# Altium PCB ChargerV2.PcbDoc
Units mm, origin at the board's own origin, x right, y up, seen from the top; angles counter-clockwise.
Board outline 48 x 33 mm, 2 copper layers (Top Layer, Bottom Layer); 15 components, 11 nets, 54 pads, 4 vias.
Unrouted connection lines stored in the file: 1.
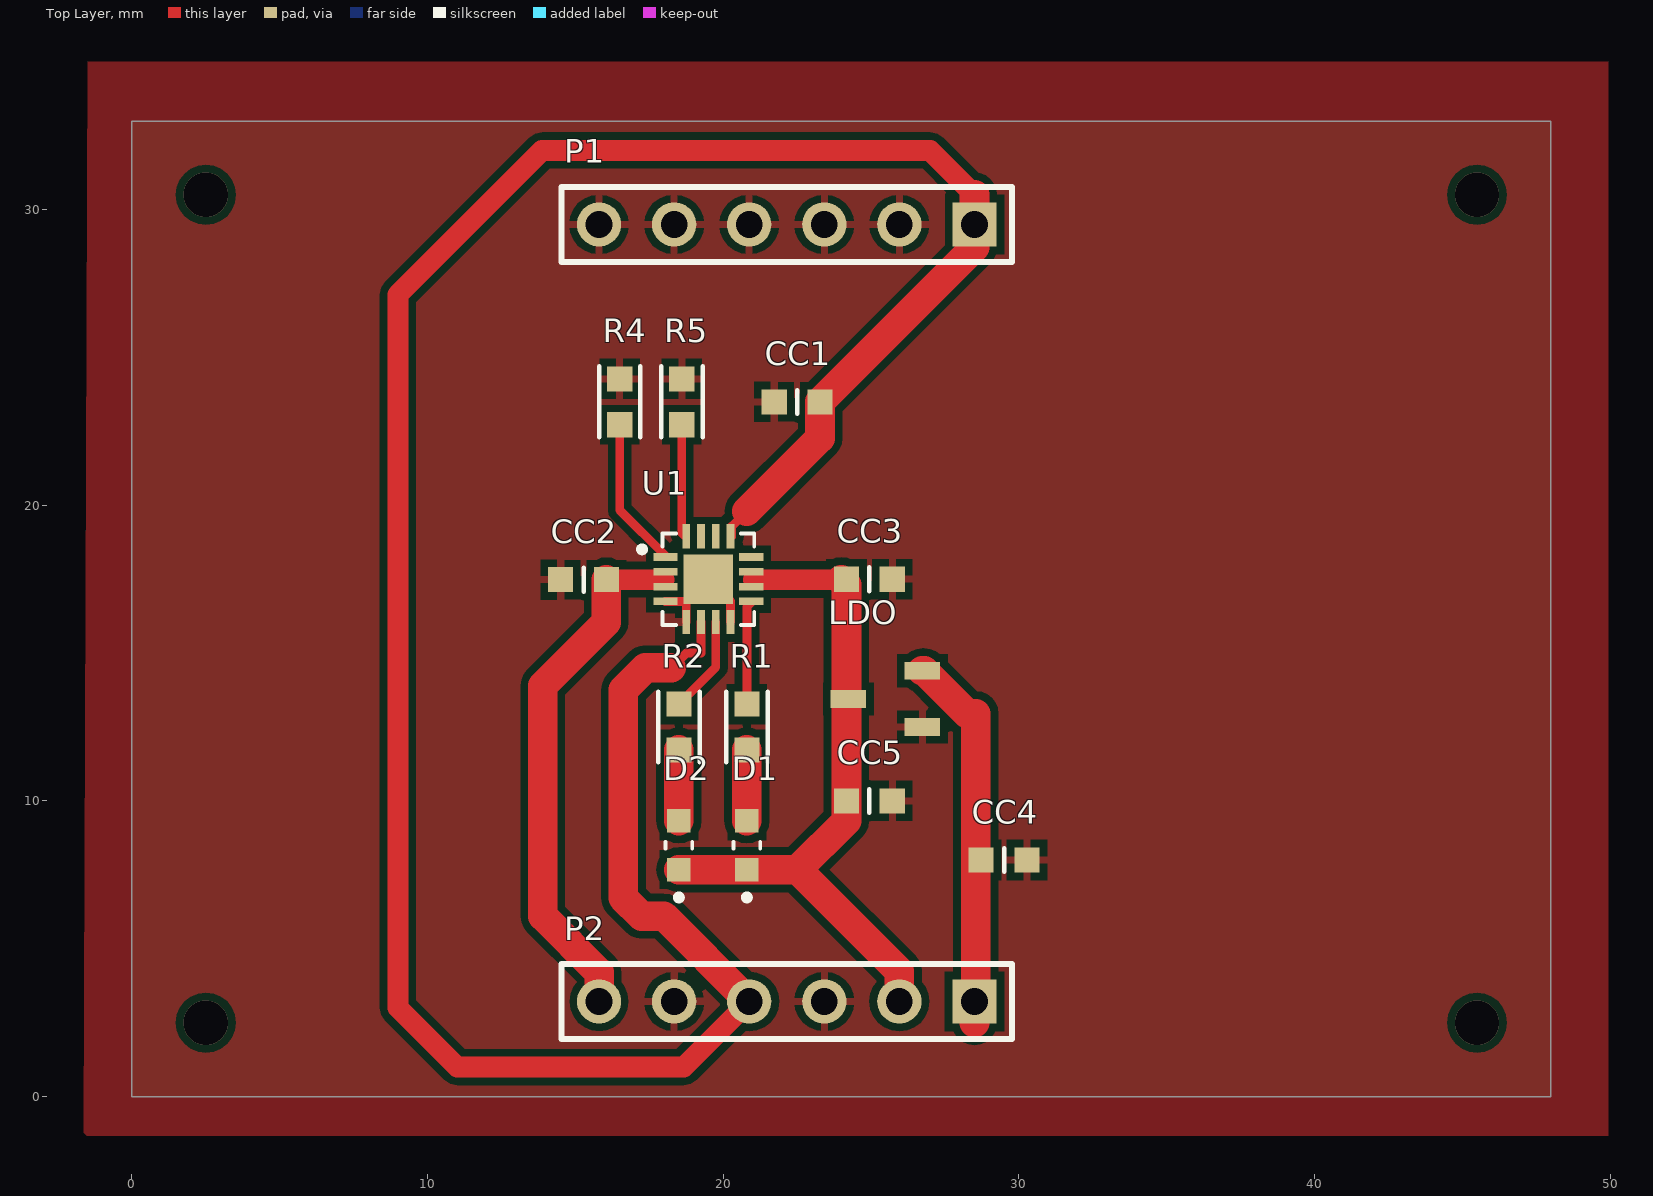
[diagram p0: Top Layer view]
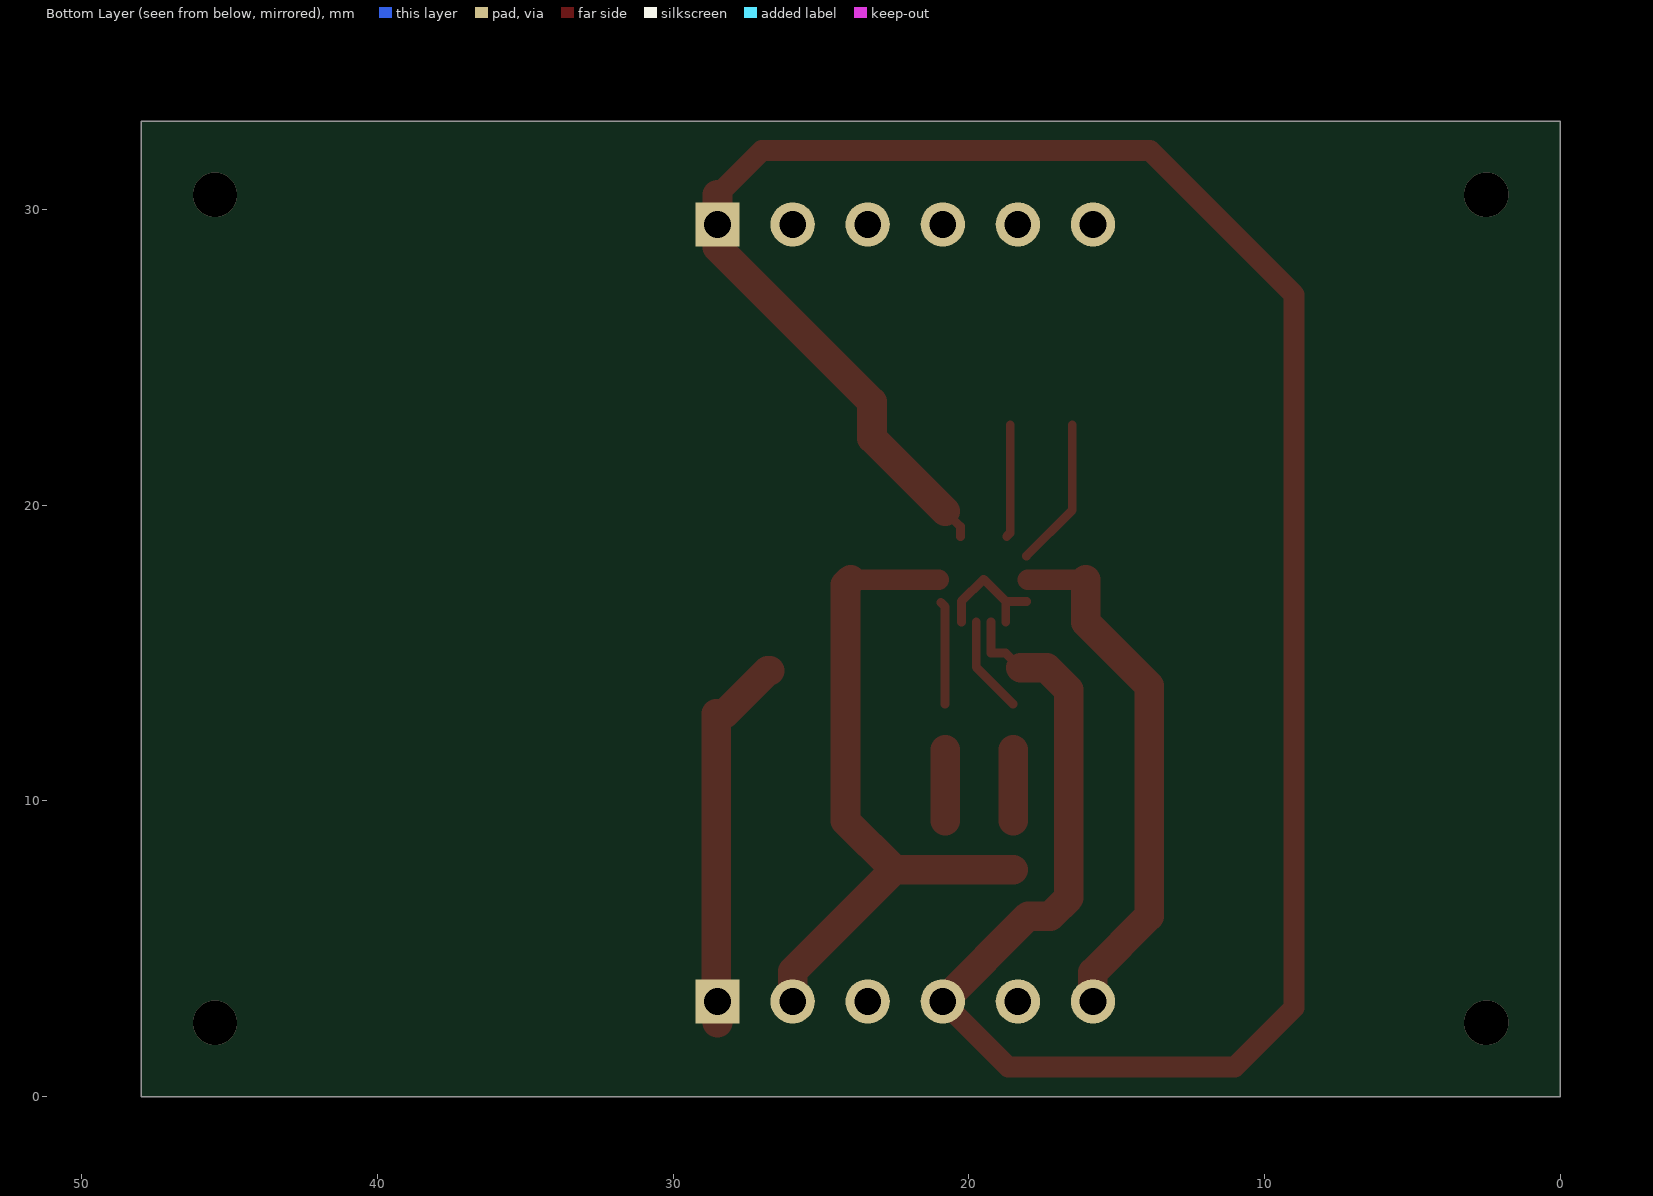
[diagram p1: Bottom Layer view, seen from below]
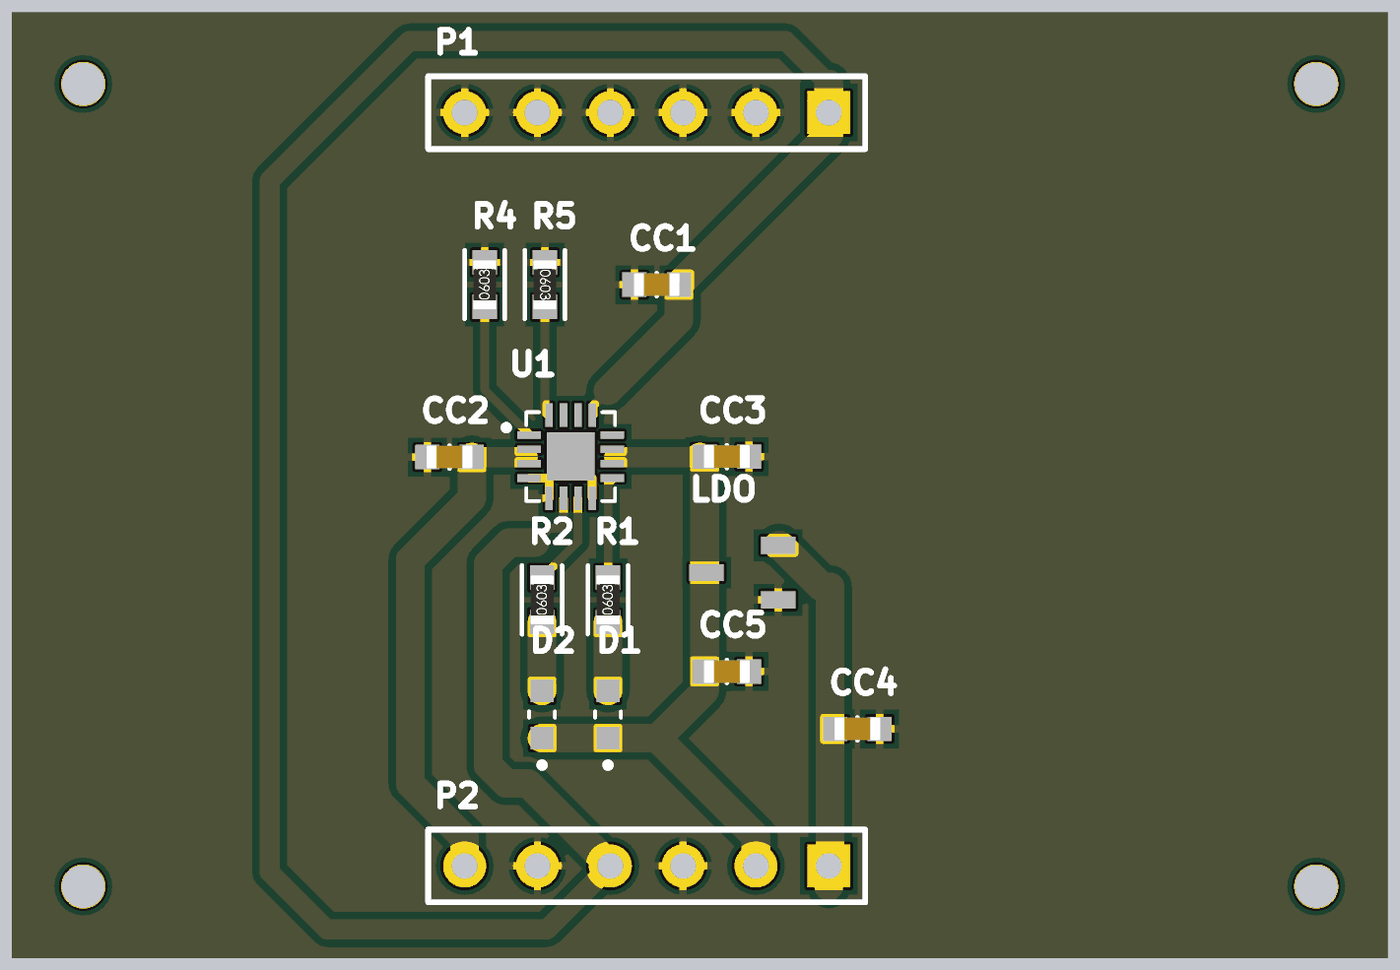
[diagram p2: 3D render of the assembled board from above, using the file's embedded part models]

## Layer stack, top to bottom
Top Solder: solder mask 0.0102, Solder Resist, Dk 3.5
Top Layer: signal copper 0.0356
Dielectric 1: dielectric 0.32, FR-4, Dk 4.8
Bottom Layer: signal copper 0.0356
Bottom Solder: solder mask 0.0102, Solder Resist, Dk 3.5

## Board outline
0,0 48,0 48,33 0,33

## Design rules (kind name [scope] priority, off if disabled: settings)
Clearance [All] p1: gap=0.254 ignorepadtopadclearanceinfootprint=FALSE except(0: Arc-Hole Track-Hole SMDPad-Hole THPad-Hole Via-Hole Fill-Hole Poly-Hole Region-Hole Text-Hole)
PolygonConnect [All] p1: connectstyle=Relief reliefconductorwidth=0.254 reliefentries=4 polygonreliefangle="90 Angle" airgapwidth=0.254
RoutingVias [All] p1: holewidth=0.711 width=1.27 viastyle="Through Hole" minholewidth=0.711 minwidth=1.27 maxholewidth=0.711 maxwidth=1.27
SolderMaskExpansion [All] p1: expansion=0.102
Width [All] p1: maxlimit=1 minlimit=0.254 preferedwidth=0.7 toplayer_minwidth=0.3 bottomlayer_maxwidth=0.254 bottomlayer_prefwidth=0.254 minimp=50.000000 maximp=50.000000 favimp=50.000000
30 further rules are at their usual default settings.

## Components (designator, comment, footprint, x,y, rotation, side; value= is the part's Value field where it differs from the comment)
CC1 "1µF" SMD-0603C 22.5,23.5 r90 top
CC2 "1µF" SMD-0603C 15.275,17.484 r90 top
CC3 "4.7µF" SMD-0603C 24.945,17.5 r90 top
CC4 "1µF" SMD-0603C 29.5,8 r90 top
CC5 "1µF" SMD-0603C 24.945,10 r270 top
D1 "SML-D12U1WT86" *LED_SML-D12Y1WT86_SML-D12U1WT86(Primary) 20.8,8.5 r90 top
D2 "SML-D12U1WT86" *LED_SML-D12Y1WT86_SML-D12U1WT86(Primary) 18.5,8.5 r90 top
LDO "250mA 3.3V Ultra Low IQ LDO Reg. SOT23 DiodesZetex AP2138N-3.3TRG1, Low Noise LDO Voltage Regulator, 250 (Min)mA, 3.3 V +/-2%, 2.5 to 6.6 Vin, 3-Pin SOT-23Source:  Datasheet" SOT95P282X145-3N 25.486,13.45 r180 top
P1 "Header 6" HDR1X6 28.5,29.5 r180 top
P2 "Header 6" HDR1X6 28.5,3.216 r180 top
R1 "1.5k" SMD-0603-RES 20.8,12.5 r0 top
R2 "1.5k" SMD-0603-RES 18.5,12.5 r0 top
R4 "10k" SMD-0603-RES 16.5,23.5 r0 top
R5 "3.4k" SMD-0603-RES 18.6,23.5 r180 top
U1 "BQ24232HARGTR" *QFN50P300X300X100-17N 19.5,17.5 r0 top

## Footprints (in the part's own frame and the unit in brackets; to place one, negate y for a bottom-side part, rotate by r counter-clockwise, add the part's x,y. Pads: shape width x height; smd on the part's side, far side on the other; paste and mask are expansions set on the pad)
*LED_SML-D12Y1WT86_SML-D12U1WT86(Primary) [mm]
  rect 0.8x0.8 smd: A(0.825,0) C(-0.825,0)
  silkscreen extent -1.86,-0.45 0.11,0.45
*QFN50P300X300X100-17N [mm]
  rect 0.82x0.26 smd: 1(-1.45,0.75) 2(-1.45,0.25) 3(-1.45,-0.25) 4(-1.45,-0.75) 9(1.45,-0.75) 10(1.45,-0.25) 11(1.45,0.25) 12(1.45,0.75)
  rect 0.26x0.82 smd: 5(-0.75,-1.45) 6(-0.25,-1.45) 7(0.25,-1.45) 8(0.75,-1.45) 13(0.75,1.45) 14(0.25,1.45) 15(-0.25,1.45) 16(-0.75,1.45)
  rect 1.68x1.68 smd: 17(0,0)
  silkscreen extent -2.34,-1.55 1.55,1.55
HDR1X6 [mm] "Connector; Header; 6 Position"
  rect 1.5x1.5 hole 0.9: 1(0,0)
  round 1.5 hole 0.9: 2(2.54,0) 3(5.08,0) 4(7.62,0) 5(10.16,0) 6(12.7,0)
  silkscreen extent -1.27,-1.27 13.97,1.27
SMD-0603-RES [mm]
  rect 0.85x0.85 smd: 1(0,0.775) 2(0,-0.775)
  silkscreen extent -0.7,-1.2 0.7,1.2, body extent -0.4,-0.85 0.4,0.85, height 0.56
SMD-0603C [mm]
  rect 0.85x0.85 smd: 1(0,0.775) 2(0,-0.775)
  silkscreen extent -0.4,0 0.4,0, body extent -0.4,-0.8 0.4,0.8, height 0.9
SOT95P282X145-3N [mm]
  rect 1.2x0.6 smd: 1(-1.25,0.95) 2(-1.25,-0.95) 3(1.25,0)

## Part data
CC1 CC2 CC4 CC5: library part GRM188R61A105KA61D, "CAP CER 1UF 10V X5R 0603", Digi-Key Part Number=490-1543-1-ND, Manufacturer="Murata Electronics North America", Operating Temperature="-55°C ~ 85°C", Package / Case="0603 (1608 Metric)", Ratings=-, Temperature Coefficient=X5R, Tolerance=±10%, Voltage=10V, @ qty=0, Applications="General Purpose", Datasheets=http://www.murata.com/~/media/webrenewal/support/library/catalog/products/capacitor/mlcc/c02e.pdf, Factory Stock=0, Features=-, Height - Seated (Max)=-, Image=//media.digikey.com/Renders/Murata%20Renders/ZRB-SERIES-0402.jpg, Lead Spacing=-, Lead Style=-, Minimum Quantity=1, Mounting Type="Surface Mount, MLCC", Packaging="Cut Tape (CT)", Part Number=GRM188R61A105KA61D, Part Status=Active, Quantity Available=2638296, Series=GRM, Size / Dimension="0.063\" L x 0.031\" W (1.60mm x 0.80mm)", Thickness (Max)="0.035\" (0.90mm)", Unit Price (USD)=0.1
CC3: library part GRM185R60G475ME15D, "CAP CER 4.7UF 4V X5R 0603", Digi-Key Part Number=490-3891-1-ND, Manufacturer="Murata Electronics North America", Operating Temperature="-55°C ~ 85°C", Package / Case="0603 (1608 Metric)", Ratings=-, Temperature Coefficient=X5R, Tolerance=±20%, Voltage=4V, @ qty=0, Applications="General Purpose", Datasheets=http://www.murata.com/~/media/webrenewal/support/library/catalog/products/capacitor/mlcc/c02e.pdf, Factory Stock=0, Features=-, Height - Seated (Max)=-, Image=//media.digikey.com/Renders/Murata%20Renders/ZRB-SERIES-0402.jpg, Lead Spacing=-, Lead Style=-, Minimum Quantity=1, Mounting Type="Surface Mount, MLCC", Packaging="Cut Tape (CT)", Part Number=GRM185R60G475ME15D, Part Status=Active, Quantity Available=29936, Series=GRM, Size / Dimension="0.063\" L x 0.031\" W (1.60mm x 0.80mm)", Thickness (Max)="0.020\" (0.50mm)", Unit Price (USD)=0.25
D1 D2: "SML-D12 Series Red 0603 Diffused 63 mcd 2.2 V Surface Mount LED", Package="0603 Rohm", Digi-Key_Part_Number=SML-D12U1WT86CT-ND, Digi-Key_Purchase_URL=https://www.digikey.com/product-detail/en/rohm-semiconductor/SML-D12U1WT86/SML-D12U1WT86CT-ND/5843858?utm_source=snapeda&utm_medium=aggregator&utm_campaign=symbol, MF=Rohm, MP=SML-D12U1WT86, SnapEDA_Link=https://www.snapeda.com/parts/SML-D12U1WT86/Rohm/view-part/?ref=snap
LDO: library part AP2138N-3.3TRG1, Manufacturer_Name="Diodes Inc.", Package=SOT95P282X145-3N, Allied_Number=70551004, Allied_Price-Stock=https://www.alliedelec.com/diodesinc-ap2138n-3-3trg1/70551004/, DeviceSetName=AP2138N-3.3TRG1, GateName_1=G$1, Height=1.45mm, LibraryName=AP2138N-3.3TRG1, Manufacturer_Part_Number=AP2138N-3.3TRG1, Mouser_Part_Number=621-AP2138N-3.3TRG1, Mouser_Price-Stock=https://www.mouser.com/Search/Refine.aspx?Keyword=621-AP2138N-3.3TRG1, RS_Part_Number=9210398P, RS_Price-Stock=http://uk.rs-online.com/web/p/products/9210398P, SymbolName_1=AP2138N-3.3TRG1
P1 P2: "Header, 6-Pin", LatestRevisionDate=17-Jul-2002, LatestRevisionNote="Re-released for DXP Platform.", Publisher="Altium Limited"
R1 R2: library part ERJ-3EKF1501V, "RES SMD 1.5K OHM 1% 1/10W 0603", Digi-Key Part Number=P1.50KHCT-ND, Manufacturer="Panasonic Electronic Components", Operating Temperature="-55°C ~ 155°C", Package / Case="0603 (1608 Metric)", Power (Watts)="0.1W, 1/10W", Supplier Device Package=0603, Temperature Coefficient=±100ppm/°C, Tolerance=±1%, @ qty=1500, Composition="Thick Film", Datasheets=http://industrial.panasonic.com/www-cgi/jvcr13pz.cgi?E+PZ+3+AOA0002+ERJ3EKF1501V+7+WW, Factory Stock=0, Failure Rate=-, Features="Automotive AEC-Q200", Height - Seated (Max)="0.022\" (0.55mm)", Image=//media.digikey.com/Photos/Panasonic%20Photos/MFG_ERJ-P6W%20Series.jpg, Minimum Quantity=1, Number of Terminations=2, Packaging="Cut Tape (CT)", Part Number=ERJ-3EKF1501V, Part Status=Active, Quantity Available=417970, Series=ERJ, Size / Dimension="0.063\" L x 0.031\" W (1.60mm x 0.80mm)", Unit Price (USD)=0.00379
R4: library part ERJ-PA3J103V, "RES SMD 10K OHM 5% 1/4W 0603", Digi-Key Part Number=P10KBZCT-ND, Manufacturer="Panasonic Electronic Components", Operating Temperature="-55°C ~ 155°C", Package / Case="0603 (1608 Metric)", Power (Watts)="0.25W, 1/4W", Supplier Device Package=0603, Temperature Coefficient=±200ppm/°C, Tolerance=±5%, @ qty=1500, Composition="Thick Film", Datasheets=https://industrial.panasonic.com/cdbs/www-data/pdf/RDA0000/AOA0000C243.pdf, Factory Stock=0, Failure Rate=-, Features="Automotive AEC-Q200, Pulse Withstanding", Height - Seated (Max)="0.022\" (0.55mm)", Image=//media.digikey.com/Photos/Panasonic%20Photos/MFG_ERJ-P6W%20Series.jpg, Minimum Quantity=1, Number of Terminations=2, Packaging="Cut Tape (CT)", Part Number=ERJ-PA3J103V, Part Status=Active, Quantity Available=26345, Series=ERJ, Size / Dimension="0.063\" L x 0.031\" W (1.60mm x 0.80mm)", Unit Price (USD)=0.01646
R5: library part ERJ-3EKF3401V, "RES SMD 3.4K OHM 1% 1/10W 0603", Digi-Key Part Number=P3.40KHCT-ND, Manufacturer="Panasonic Electronic Components", Operating Temperature="-55°C ~ 155°C", Package / Case="0603 (1608 Metric)", Power (Watts)="0.1W, 1/10W", Supplier Device Package=0603, Temperature Coefficient=±100ppm/°C, Tolerance=±1%, @ qty=1500, Composition="Thick Film", Datasheets=http://industrial.panasonic.com/www-cgi/jvcr13pz.cgi?E+PZ+3+AOA0002+ERJ3EKF3401V+7+WW, Factory Stock=0, Failure Rate=-, Features="Automotive AEC-Q200", Height - Seated (Max)="0.022\" (0.55mm)", Image=//media.digikey.com/Photos/Panasonic%20Photos/MFG_ERJ-P6W%20Series.jpg, Minimum Quantity=1, Number of Terminations=2, Packaging="Cut Tape (CT)", Part Number=ERJ-3EKF3401V, Part Status=Active, Quantity Available=58954, Series=ERJ, Size / Dimension="0.063\" L x 0.031\" W (1.60mm x 0.80mm)", Unit Price (USD)=0.00379
U1: "USB-Friendly Lithium-Ion Battery Charger and Power-Path Management IC 0.5A 10.5V OVP 16-Pin QFN T/R", Package="VFQFN-16 Texas Instruments", Digi-Key_Part_Number=296-49554-1-ND, Digi-Key_Purchase_URL=https://www.digikey.com/product-detail/en/texas-instruments/BQ24232HARGTR/296-49554-1-ND/9462552?utm_source=snapeda&utm_medium=aggregator&utm_campaign=symbol, MF="Texas Instruments", MP=BQ24232HARGTR, SnapEDA_Link=https://www.snapeda.com/parts/BQ24232HARGTR/Texas%20Instruments/view-part/?ref=snap

## Via types
v1: diameter 1.5, hole 1.5, Top Layer to Bottom Layer, 4 vias

## Nets (pads, with @x,y where several pads share a name; then routed paths per layer and width w, separated by ;. In a path a pad name is that pad's centre, name@x,y a point inside that pad or via, vN(x,y) a via of type N, cw(c..) or ccw(c..) an arc to the next point about the centre after c; other vN are vias at no path point)
GND: CC1.1 CC2.1 CC3.2 CC4.2 CC5.1 LDO.1 P1.2 P1.3 P1.4 P1.5 P1.6 P2.3 P2.5 R4.1 R5.2 U1.4 U1.5 U1.8 U1.17 | length 4.2
  Top Layer w0.3: U1.4 U1.17@18.75,16.75 ; U1.5 U1.17@18.75,16.75 ; U1.8 20.25,16.75 U1.17 U1.17@18.75,16.75
NetD1_A: D1.A R1.2 | length 2.4
  Top Layer w1: D1.A R1.2
NetD2_A: D2.A R2.2 | length 2.4
  Top Layer w1: D2.A R2.2
NetR1_1: R1.1 U1.9 | length 3.5
  Top Layer w0.3: R1.1 20.8,16.566 U1.9@20.95,16.716
NetR2_1: R2.1 U1.7 | length 3.3
  Top Layer w0.3: R2.1 19.75,14.525 U1.7
NetR4_2: R4.2 U1.1 | length 5.1
  Top Layer w0.3: R4.2 16.5,19.834 U1.1@18.05,18.284
NetR5_1: R5.1 U1.16 | length 3.8
  Top Layer w0.3: R5.1 18.6,19.066 U1.16@18.716,18.95
VBAT: CC2.2 P2.6 U1.2 U1.3 | length 17.9
  Top Layer w0.3: CC2.2@16,17.75 CC2.2@16.034,17.716
  Top Layer w0.7: CC2.2 18,17.484
  Top Layer w1: P2.6 15.8,4.2 13.9,6.1 13.9,13.9 16.05,16.05 CC2.2
VIN: CC1.2 P1.1 P2.4 U1.6 U1.13 | length 91.7
  Top Layer w0.3: 18.25,14.5 18.75,15 19.196,15 ; 19.25,15 U1.6 ; U1.13@20.284,18.95 20.284,19.284 20.8,19.8
  Top Layer w0.7: P2.4 18.664,1 11,1 9,3 9,27.127 13.873,32 27,32 28.5,30.5
  Top Layer w1: 18.25,14.5 17.363,14.5 16.62,13.757 16.62,6.72 17.24,6.1 17.996,6.1 P2.4 ; 20.8,19.8 23.275,22.275 CC1.2 28.5,28.725 P1.1 28.5,30.5
VLDO: CC4.1 LDO.2 P2.1 | length 12.9
  Top Layer w1: LDO.2 26.803,14.4 28.253,12.95 28.55,12.95 28.55,3.528 28.5,3.478 P2.1 P2.1@28.5,2.5
VOUT: CC3.1 CC5.2 D1.C D2.C LDO.3 P2.2 U1.10 U1.11 | length 23.5
  Top Layer w0.7: 21.016,17.484 CC3.1@24,17.484
  Top Layer w1: D2.C D1.C 22.52,7.675 ; CC3.1@24,17.484 24.17,17.314 CC5.2 24.17,9.325 22.52,7.675 ; P2.2 25.96,4.235 22.52,7.675
pads on no net: U1.12 U1.14 U1.15
copper on no net:
  other v1: 2.5,2.5 45.5,2.5 2.5,30.5 45.5,30.5

## Polygon pours and split planes (outlines as drawn)
GND on Top Layer "Top Layer-GND" (solid, pour order 0): -1.5,35 49.935,35 49.935,-1.322 -1.627,-1.322